# Altium PCB BroadPCB.PcbDoc
Units mm, origin at the board's own origin, x right, y up, seen from the top; angles counter-clockwise.
Board outline 99.69 x 75.56 mm, 2 copper layers (Top Layer, Bottom Layer); 78 components, 55 nets, 326 pads, 112 vias.
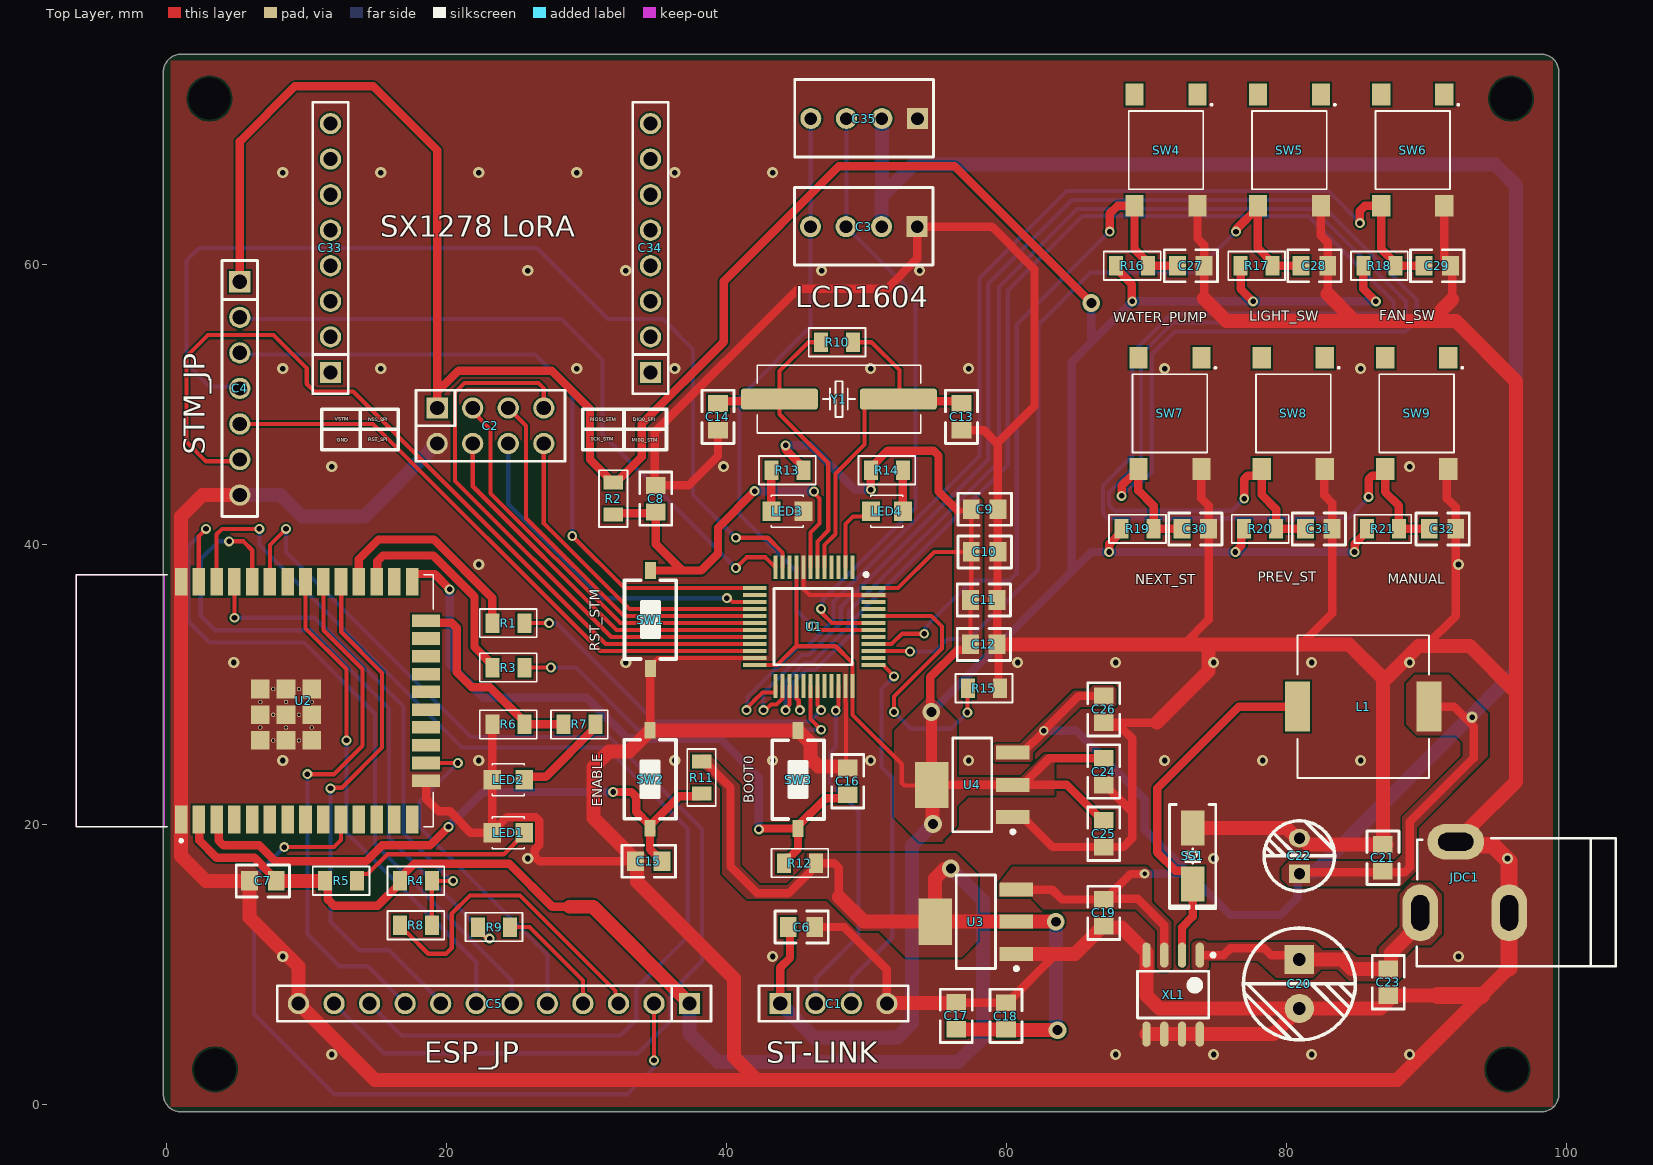
[diagram p0: Top Layer view]
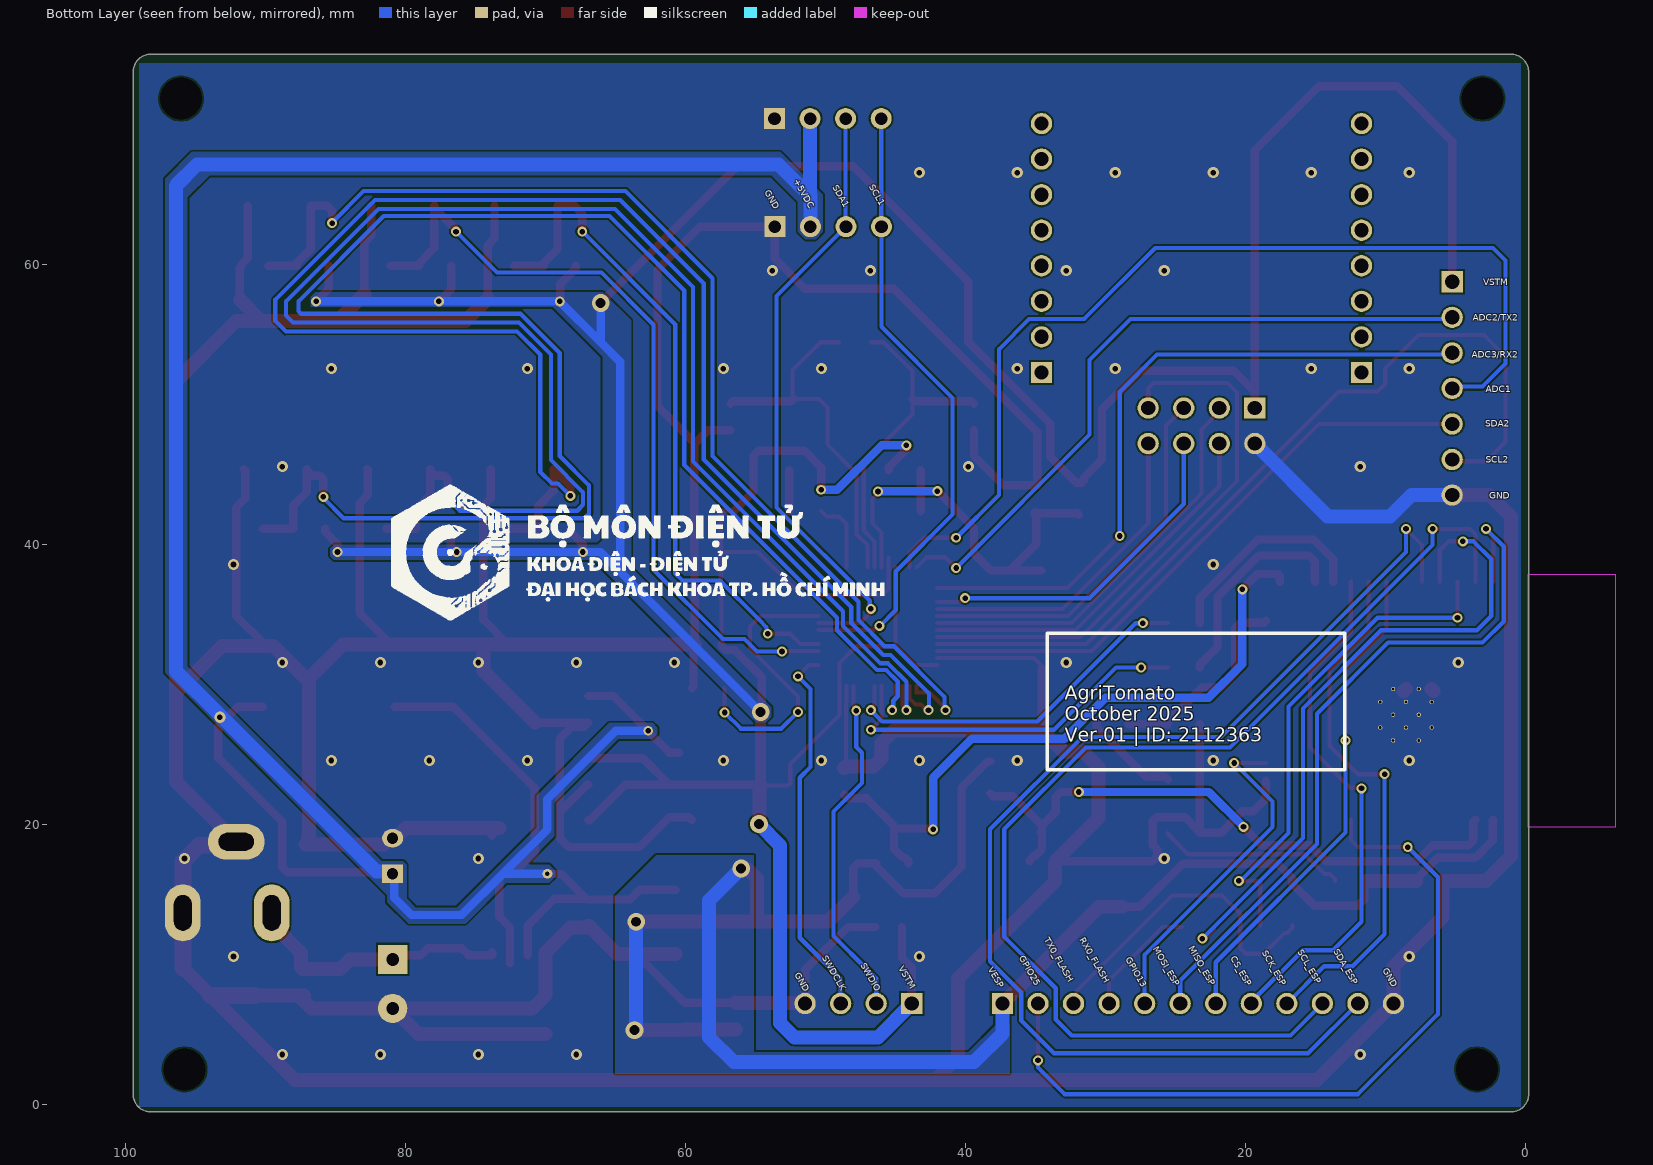
[diagram p1: Bottom Layer view, seen from below]
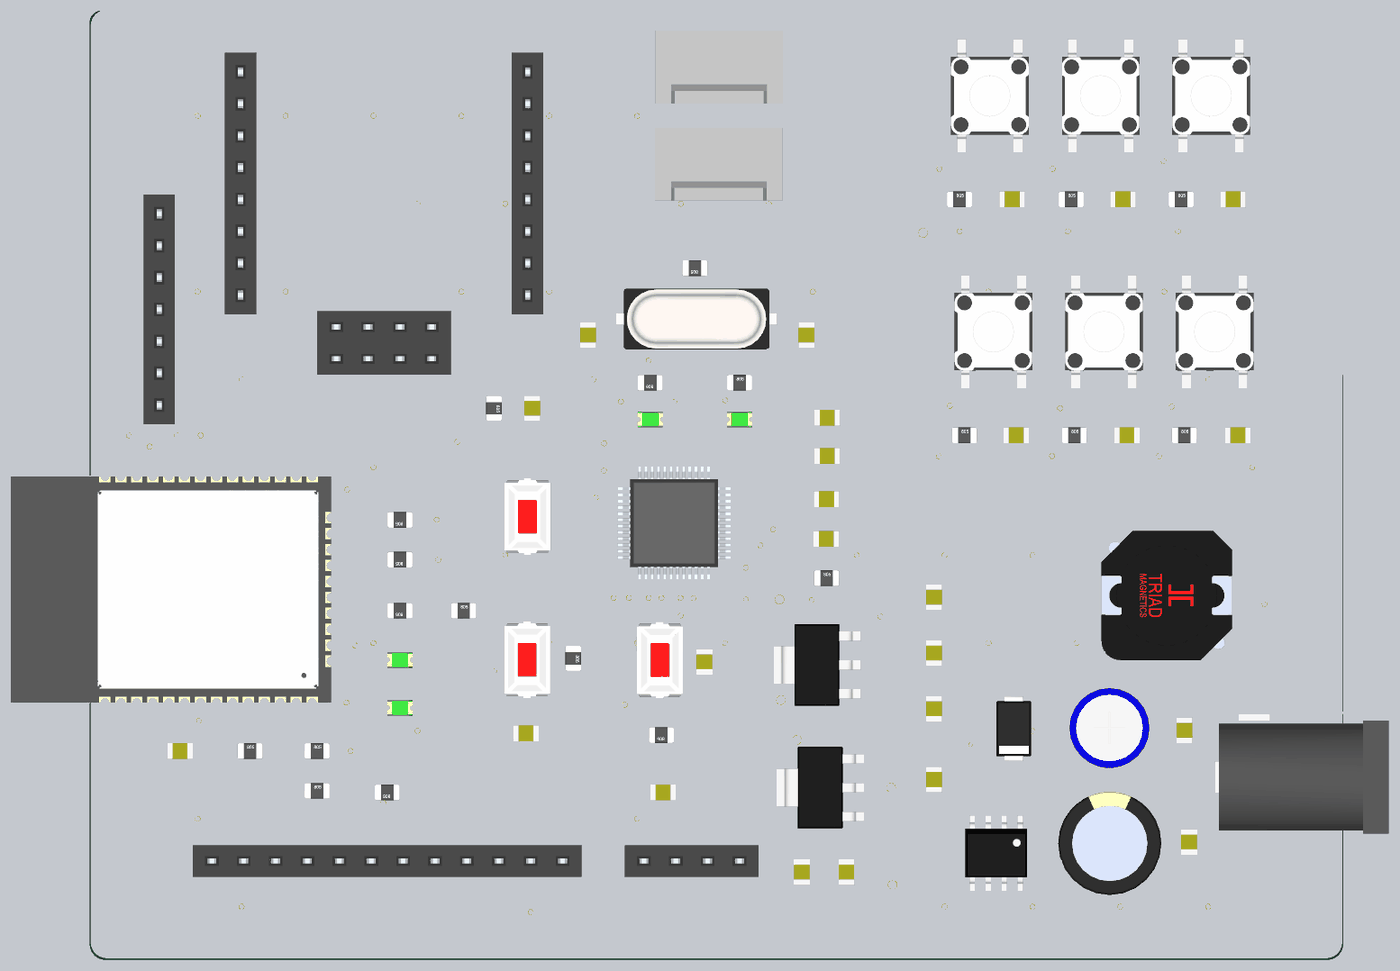
[diagram p2: 3D render of the assembled board from above, using the file's embedded part models]

## Layer stack, top to bottom
Top Solder: solder mask 0.0102, Solder Resist, Dk 3.5
Top Layer: signal copper 0.0356
Dielectric 1: dielectric 0.32, FR-4, Dk 4.8
Bottom Layer: signal copper 0.0356
Bottom Solder: solder mask 0.0102, Solder Resist, Dk 3.5

## Board outline
-0.254,0.762 -0.254,73.787 cw(c1.016,73.787) 1.016,75.057 98.171,75.057 cw(c98.171,73.787) 99.441,73.787 99.441,0.762 cw(c98.171,0.762) 98.171,-0.508 1.016,-0.508 cw(c1.016,0.762)

## Design rules (kind name [scope] priority, off if disabled: settings)
Clearance [All] p1: gap=0.127 ignorepadtopadclearanceinfootprint=TRUE except(0.2: Arc-Via Track-Via Via-Via; 0.28: Arc-THPad Track-THPad)
HoleSize [All] p1: absolutevalues=TRUE maxlimit=10 minlimit=0.025 maxpercent=80.000 minpercent=20.000
HoleToHoleClearance [All] p1: gap=0.45 allowstackedmicrovias=TRUE
MinimumSolderMaskSliver [All] p1: minsoldermaskwidth=0.1
PlaneConnect [All] p1: pad.planeconnectstyle=Relief pad.reliefexpansion=0.508 pad.reliefentries=4 pad.reliefconductorwidth=0.508 pad.reliefairgap=0.254 via.planeconnectstyle=Direct via.reliefexpansion=0.508 via.reliefentries=4 via.reliefconductorwidth=0.254 via.reliefairgap=0.254
PolygonConnect [All] p1: connectstyle=Direct reliefconductorwidth=0.508 reliefentries=4 polygonreliefangle="90 Angle" airgapwidth=0.254
RoutingVias [All] p1: holewidth=0.711 width=1.27 viastyle="Through Hole" minholewidth=0.3 minwidth=0.5 maxholewidth=1 maxwidth=6.3
SilkToSolderMaskClearance [IsPad] p1: minsilkscreentomaskgap=0.15 clearancetoexposedcopper=TRUE
SolderMaskExpansion [All] p1: expansion=0.05 istentingtop=FALSE
Width [All] p1: maxlimit=3 minlimit=0.254 preferedwidth=0.6 minimp=50.000000 maximp=50.000000 favimp=50.000000
25 further rules are at their usual default settings.

## Components (designator, comment, footprint, x,y, rotation, side; value= is the part's Value field where it differs from the comment)
C1 "SWD" JP4-C1T 43.815,7.239 r0 top
C2 "LORA_JP" JP4-C2T 23.114,48.514 r0 top locked
C3 "LCD_HEAD" HDR4 53.594,62.738 r180 top
C4 "STM_JP" JP7-C1T 5.207,58.801 r270 top
C5 "ESP_JP" JP12-C1T 37.338,7.239 r180 top
C6 "0.1uF" "tu 0805" 45.339,12.7 r180 top
C7 "10uF" "tu 0805" 6.858,16.002 r180 top
C8 "0.1uF" "tu 0805" 34.925,43.307 r270 top
C9 "0.1uF" "tu 0805" 58.42,42.545 r180 top
C10 "0.1uF" "tu 0805" 58.42,39.497 r180 top
C11 "0.1uF" "tu 0805" 58.363,36.065 r180 top
C12 "0.1uF" "tu 0805" 58.358,32.89 r180 top
C13 "20pF" "tu 0805" 56.769,49.149 r270 top
C14 "20pF" "tu 0805" 39.37,49.149 r270 top
C15 "0.1uF" "tu 0805" 34.417,17.399 r0 top
C16 "0.1uF" "tu 0805" 48.641,23.114 r270 top
C17 "100nF" "tu 0805" 56.388,6.35 r90 top
C18 "10uF" "tu 0805" 59.944,6.35 r270 top
C19 "10uF" "tu 0805" 66.929,13.716 r90 top
C20 "470uF" "tu hoa 8mm" 80.899,8.636 r270 top
C21 "0.1uF" "tu 0805" 86.868,17.653 r270 top
C22 "100uF" "tu hoa 5mm" 80.899,17.78 r90 top
C23 "1uF" "tu 0805" 87.249,8.763 r270 top
C24 "100nF" "tu 0805" 66.932,23.814 r270 top
C25 "10uF" "tu 0805" 66.926,19.366 r90 top
C26 "10uF" "tu 0805" 66.926,28.251 r90 top
C27 "0.1uF" "tu 0805" 73.152,59.944 r180 top
C28 "0.1uF" "tu 0805" 81.98,59.941 r180 top
C29 "0.1uF" "tu 0805" 90.748,59.941 r180 top
C30 "0.1uF" "tu 0805" 73.471,41.145 r180 top
C31 "0.1uF" "tu 0805" 82.296,41.148 r180 top
C32 "0.1uF" "tu 0805" 91.129,41.145 r180 top
C33 "JP9" JP8-C1T 11.684,52.324 r90 top locked
C34 "JP8" JP8-C1T 34.544,52.324 r90 top locked
C35 "LCD_HEAD" HDR4 53.619,70.46 r180 top
JDC1 "Jac DC" DC0 92.71,16.256 r180 top locked
L1 "68uH" IND_370_401_140X70_SMD 80.77,28.448 r90 top
LED1 "LED" LED-0805-Green 25.527,19.431 r180 top value="LED 3 - 5 ly 2 Colour"
LED2 "LED" LED-0805-Green 25.527,23.241 r180 top value="LED 3 - 5 ly 2 Colour"
LED3 "LED" LED-0805-Green 43.18,42.418 r0 top value="LED 3 - 5 ly 2 Colour"
LED4 "LED" LED-0805-Green 52.578,42.418 r180 top value="LED 3 - 5 ly 2 Colour"
R1 "1K" RES-SMD-0805 24.384,34.417 r180 top
R2 "10K" RES-SMD-0805 31.877,43.307 r270 top
R3 "1K" RES-SMD-0805 24.384,31.242 r180 top
R4 "10K" RES-SMD-0805 17.78,16.002 r0 top
R5 "1K" RES-SMD-0805 12.446,16.002 r0 top
R6 "10K" RES-SMD-0805 24.384,27.178 r180 top
R7 "1K" RES-SMD-0805 29.464,27.178 r0 top
R8 "1K" RES-SMD-0805 17.78,12.827 r0 top
R9 "1K" RES-SMD-0805 23.368,12.7 r180 top
R10 "1M" RES-SMD-0805 47.879,54.483 r180 top
R11 "10K" RES-SMD-0805 38.195,23.385 r270 top
R12 "10K" RES-SMD-0805 45.212,17.272 r180 top
R13 "510" RES-SMD-0805 44.323,45.339 r180 top
R14 "510" RES-SMD-0805 51.435,45.339 r0 top
R15 "10K" RES-SMD-0805 58.369,29.769 r0 top
R16 "10K" RES-SMD-0805 68.961,59.944 r0 top
R17 "10K" RES-SMD-0805 77.851,59.944 r0 top
R18 "10K" RES-SMD-0805 86.614,59.944 r0 top
R19 "10K" RES-SMD-0805 69.342,41.148 r0 top
R20 "10K" RES-SMD-0805 78.105,41.148 r0 top
R21 "10K" RES-SMD-0805 86.868,41.148 r0 top
SS1 "SS34" "DIODE SMA" 73.279,17.78 r270 top
SW1 "EN/RST" SW1-SMD 34.544,34.671 r90 top value="SW chip 2 pin"
SW2 "EN/RST" SW1-SMD 34.512,23.258 r270 top value="SW chip 2 pin"
SW3 "BOOT" SW1-SMD 45.085,23.241 r270 top value="SW chip 2 pin"
SW4 "STATE_1" SW2-SMD 71.374,68.199 r270 top value="Button chip 4 pin"
SW5 "STATE_2" SW2-SMD 80.188,68.199 r270 top value="Button chip 4 pin"
SW6 "STATE_3" SW2-SMD 89.002,68.199 r270 top value="Button chip 4 pin"
SW7 "STATE_4" SW2-SMD 71.653,49.403 r270 top value="Button chip 4 pin"
SW8 "STATE_5" SW2-SMD 80.467,49.403 r270 top value="Button chip 4 pin"
SW9 "STATE_6" SW2-SMD 89.281,49.403 r270 top value="Button chip 4 pin"
U1 "STM32F103C8T6" LQFP-48_19.6_393_58X11_SMD 46.228,34.163 r270 top
U2 "ESP32 WROOM 32" ESP32-WROOM-32D 6.269,28.87 r90 top locked
U3 "LM1117-3.3V" SOT223 57.785,13.081 r90 top
U4 "LM1117-3.3V" SOT223 57.531,22.86 r90 top
XL1 "XL1509_5V" SO8 71.882,7.874 r270 top
Y1 "8MHz" "Thach Anh 2 chan SMD" 48.006,50.419 r0 top value=4Mhz

## Footprints (in the part's own frame and the unit in brackets; to place one, negate y for a bottom-side part, rotate by r counter-clockwise, add the part's x,y. Pads: shape width x height; smd on the part's side, far side on the other; paste and mask are expansions set on the pad)
DC0 [mil] "Jac DC input"
  oval 100x160 hole 50 slot 100 at 90 deg: 1(125,100) 2(-125,100)
  oval 160x100 hole 50 slot 100 at 0 deg: 3(25,-100)
  silkscreen extent -425,-110 135,250, body extent -410,-105 134,269, height 434
"DIODE SMA" [mm] "SMA"
  rect 2.5x1.7 smd: 1(-2,0) 2(2,0)
  silkscreen extent -3.68,-1.65 3.75,1.65, body extent -2.6,-1.37 2.6,1.37, height 2.4
ESP32-WROOM-32D [mm]
  rect 2x0.9 smd: 1(-8.5,5.26) 2(-8.5,3.99) 3(-8.5,2.72) 4(-8.5,1.45) 5(-8.5,0.18) 6(-8.5,-1.09) 7(-8.5,-2.36) 8(-8.5,-3.63) 9(-8.5,-4.9) 10(-8.5,-6.17) 11(-8.5,-7.44) 12(-8.5,-8.71) 13(-8.5,-9.98) 14(-8.5,-11.25) 25(8.5,-11.25) 26(8.5,-9.98) 27(8.5,-8.71) 28(8.5,-7.44) 29(8.5,-6.17) 30(8.5,-4.9) 31(8.5,-3.63) 32(8.5,-2.36) 33(8.5,-1.09) 34(8.5,0.18) 35(8.5,1.45) 36(8.5,2.72) 37(8.5,3.99) 38(8.5,5.26)
  rect 0.9x2 smd: 15(-5.715,-12.25) 16(-4.445,-12.25) 17(-3.175,-12.25) 18(-1.905,-12.25) 19(-0.635,-12.25) 20(0.635,-12.25) 21(1.905,-12.25) 22(3.175,-12.25) 23(4.445,-12.25) 24(5.715,-12.25)
  rect 1.33x1.33 smd: 39(-2.835,-2.24) 39(-2.835,-0.405) 39(-2.835,-4.075) 39(-1,-0.405) 39(-1,-4.075) 39(-1,-2.24) 39(0.835,-0.405) 39(0.835,-4.075) 39(0.835,-2.24)
  round 0.3 hole 0.2 mask+0.08: 39(-2.835,-1.322) 39(-2.835,-3.157) 39(-1.917,-2.24) 39(-1.917,-0.405) 39(-1.917,-4.075) 39(-1,-1.322) 39(-1,-3.157) 39(-0.082,-0.405) 39(-0.082,-2.24) 39(-0.082,-4.075) 39(0.835,-1.322) 39(0.835,-3.157)
  Keep-Out Layer region: 9,6.45 -9,6.45 -9,12.75 9,12.75
  Keep-Out Layer region: 9,6.45 -9,6.45 -9,12.75 9,12.75
  silkscreen extent -10.1,-12.75 9,12.75, body extent -9,-12.62 9,12.88, height 3.2
HDR4 [mm] "Connector; Header; 4 Position"
  rect 1.5x1.5 hole 0.9: 1(0,0)
  round 1.5 hole 0.9: 2(2.54,0) 3(5.08,0) 4(7.62,0)
  silkscreen extent -1.14,-2.79 8.76,2.74, body extent -1.27,-2.92 8.89,2.88, height 11.72
IND_370_401_140X70_SMD [mm] "SMD INDUCTOR"
  rect 3.56x1.78 smd: 1(0,0) 2(0,-9.4)
  silkscreen extent -5.1,-9.4 5.1,0, body extent -5.2,-9.9 5.1,0.5, height 4.01
JP4-C1T [mm] "4 row, straight, gold plating"
  rect 1.52x1.52 hole 1.02: 1(0,0)
  round 1.52 hole 1.02: 2(2.54,0) 3(5.08,0) 4(7.62,0)
  silkscreen extent -1.52,-1.27 9.14,1.27, body extent -1.52,-1.25 9.14,1.25, height 8.51
JP4-C2T [mm] "8 pins, dual row, straight, gold plating"
  rect 1.52x1.52 hole 1.02: 1(-3.81,1.27)
  round 1.52 hole 1.02: 2(-1.27,1.27) 3(1.27,1.27) 4(3.81,1.27) 5(3.81,-1.27) 6(1.27,-1.27) 7(-1.27,-1.27) 8(-3.81,-1.27)
  silkscreen extent -5.33,-2.54 5.33,2.54, body extent -5.33,-2.54 5.33,2.54, height 8.51
JP7-C1T [mm] "7 row, straight, gold plating"
  rect 1.52x1.52 hole 1.02: 1(0,0)
  round 1.52 hole 1.02: 2(2.54,0) 3(5.08,0) 4(7.62,0) 5(10.16,0) 6(12.7,0) 7(15.24,0)
  silkscreen extent -1.52,-1.27 16.76,1.27, body extent -1.52,-1.25 16.76,1.25, height 8.51
JP8-C1T [mm] "8 row, straight, gold plating"
  rect 1.52x1.52 hole 1.02: 1(0,0)
  round 1.52 hole 1.02: 2(2.54,0) 3(5.08,0) 4(7.62,0) 5(10.16,0) 6(12.7,0) 7(15.24,0) 8(17.78,0)
  silkscreen extent -1.52,-1.27 19.3,1.27, body extent -1.52,-1.25 19.3,1.25, height 8.51
JP12-C1T [mm] "12 row, straight, gold plating"
  rect 1.52x1.52 hole 1.02: 1(0,0)
  round 1.52 hole 1.02: 2(2.54,0) 3(5.08,0) 4(7.62,0) 5(10.16,0) 6(12.7,0) 7(15.24,0) 8(17.78,0) 9(20.32,0) 10(22.86,0) 11(25.4,0) 12(27.94,0)
  silkscreen extent -1.52,-1.27 29.46,1.27, body extent -1.52,-1.25 29.46,1.25, height 8.51
LED-0805-Green [mil]
  rect 50x55 smd: 1(0,0) 2(90,0)
  silkscreen extent 0,-45 90,45, body extent 5,-25 85,25, height 43
LQFP-48_19.6_393_58X11_SMD [mm] "48LQFP"
  rect 1.7x0.3 smd mask+0.05: 1(-4.238,2.75) 2(-4.238,2.25) 3(-4.238,1.75) 4(-4.238,1.25) 5(-4.238,0.75) 6(-4.238,0.25) 7(-4.238,-0.25) 8(-4.238,-0.75) 9(-4.238,-1.25) 10(-4.238,-1.75) 11(-4.238,-2.25) 12(-4.238,-2.75) 25(4.238,-2.75) 26(4.238,-2.25) 27(4.238,-1.75) 28(4.238,-1.25) 31(4.238,0.25) 32(4.238,0.75) 33(4.238,1.25) 34(4.238,1.75) 35(4.238,2.25) 36(4.238,2.75)
  rect 0.3x1.7 smd mask+0.05: 13(-2.75,-4.238) 14(-2.25,-4.238) 15(-1.75,-4.238) 16(-1.25,-4.238) 17(-0.75,-4.238) 18(-0.25,-4.238) 19(0.25,-4.238) 20(0.75,-4.238) 21(1.25,-4.238) 22(1.75,-4.238) 23(2.25,-4.238) 24(2.75,-4.238) 37(2.75,4.238) 38(2.25,4.238) 39(1.75,4.238) 40(1.25,4.238) 41(0.75,4.238) 42(0.25,4.238) 43(-0.25,4.238) 44(-0.75,4.238) 45(-1.25,4.238) 46(-1.75,4.238) 47(-2.25,4.238) 48(-2.75,4.238)
  rect 1.7x0.3 smd paste+0 mask+0.05: 29(4.238,-0.75)
  rect 1.7x0.3 smd paste+0.05 mask+0.05: 30(4.238,-0.25)
  silkscreen extent -3.84,-2.85 2.73,3.85, body extent -4.5,-4.5 4.5,4.5, height 1.7
RES-SMD-0805 [mil]
  rect 39.37x55 smd mask+2.99: 1(-45,0) 2(45,0)
  silkscreen extent -80,-40 80,40, body extent -39,-25 39,25, height 31
SO8 [mm] "SOIC, 8-Leads, Body 4.9x3.9mm, Pitch 1.27mm, IPC High Density"
  oval 1.8x0.6 smd: 1(-2.825,1.905) 2(-2.825,0.635) 3(-2.825,-0.635) 4(-2.825,-1.905) 5(2.825,-1.905) 6(2.825,-0.635) 7(2.825,0.635) 8(2.825,1.905)
  silkscreen extent -2.95,-2.55 1.68,2.98, body extent -2.99,-2.45 3,2.45, height 1.6
SOT223 [mm]
  rect 1x2.4 smd: 1(-2.3,-2.9) 2(0,-2.9) 3(2.3,-2.9)
  rect 3.3x2.4 smd: 4(0,2.9)
  silkscreen extent -3.47,-3.03 3.35,1.4, body extent -3.25,-3.56 3.25,3.4, height 1.68
SW1-SMD [mm]
  rect 1.2x0.8 smd: 1(-3.5,0) 2(3.5,0)
  silkscreen extent -2.82,-1.85 2.82,1.85, body extent -3.05,-1.85 3.05,1.85, height 2.5
SW2-SMD [mm] "6*6mm vertical type, SMD, height 5.0mm, black actuator, 160gf, T&R"
  rect 1.55x1.3 smd: 1(-3.975,2.25) 2(-3.975,-2.25) 3(3.975,-2.25) 4(3.975,2.25)
  silkscreen extent -3.29,-2.67 2.79,3.29, body extent -4.5,-3.1 4.5,3.1, height 4.99
"Thach Anh 2 chan SMD" [mm] "SMD Crystal HC49/US-SM package"
  round 0.508 on Mech15: 0(0,0)
  rrect25% 5.5x1.5 smd: 1(-4.25,0) 2(4.25,0)
  silkscreen extent -5.84,-2.41 5.84,2.41, body extent -6.4,-2.41 6.4,2.42, height 4.29
"tu 0805" [mm] "Compoment SMD 80x50mil"
  rect 1.2x1.4 smd: 1(-0.946,-0.003) 2(0.954,-0.003)
  silkscreen extent -1.91,-1.14 1.91,1.14, body extent -1.01,-0.64 1.01,0.63, height 0.61
"tu hoa 5mm" [mm]
  rect 1.3x1.5 hole 0.8: 1(-1.27,0)
  oval 1.3x1.5 hole 0.8: 2(1.27,0)
  silkscreen extent -2.51,-2.51 2.51,2.51, body extent -3.12,-3.18 3.23,3.18, height 14.55
"tu hoa 8mm" [mm]
  rect 2.1x2.1 hole 0.9: 1(-1.75,0)
  round 2.1 hole 0.9: 2(1.75,0)
  silkscreen extent -4,-4 4,4, body extent -4.1,-4.07 4.1,4.13, height 13.81

## Part data
C1: library part JP4, "WR-PHD 2.54 mm Angled Socket Header", Manufacturer="W¨¹rth Elektronik eiSos GmbH", partNo=613004143121, ComponentLink1 Description=Manufacturer, ComponentLink1URL=http://www.we-online.com, ComponentLink2 Description=Datasheet, ComponentLink2URL=http://katalog.we-online.de/em/datasheet/6130xx143121.pdf, Created by="Karrer Zheng", Created Date="29 March 2013", NoPins=04
C2: library part JP4x2, "WR-PHD 2.54 mm Dual Socket Header", Manufacturer="W¨¹rth Elektronik eiSos GmbH", partNo=61300821821, ComponentLink1 Description=Manufacturer, ComponentLink1URL=http://www.we-online.com, ComponentLink2 Description=Datasheet, ComponentLink2URL=http://katalog.we-online.de/em/datasheet/6130xx21821.pdf, Created by="Karrer Zheng", Created Date="29 March 2013", NoPins=08
C3 C35: library part Header4, "Header IDC, 4 x 1 Pin Vertical 2.54mm Pitch (Non-Boxed, Male)", Manufacturer="W¨¹rth Elektronik eiSos GmbH", partNo=613002143121, ComponentLink1 Description=Manufacturer, ComponentLink1URL=http://www.we-online.com, ComponentLink2 Description=Datasheet, ComponentLink2URL=http://katalog.we-online.de/em/datasheet/6130xx143121.pdf, Created by="Karrer Zheng", Created Date="29 March 2013", NoPins=02
C4: library part JP7, "WR-PHD 2.54 mm Angled Socket Header", Manufacturer="W¨¹rth Elektronik eiSos GmbH", partNo=613007143121, ComponentLink1 Description=Manufacturer, ComponentLink1URL=http://www.we-online.com, ComponentLink2 Description=Datasheet, ComponentLink2URL=http://katalog.we-online.de/em/datasheet/6130xx143121.pdf, Created by="Karrer Zheng", Created Date="29 March 2013", NoPins=07
C5: library part JP12, "WR-PHD 2.54 mm Angled Socket Header", Manufacturer="W¨¹rth Elektronik eiSos GmbH", partNo=613012143121, ComponentLink1 Description=Manufacturer, ComponentLink1URL=http://www.we-online.com, ComponentLink2 Description=Datasheet, ComponentLink2URL=http://katalog.we-online.de/em/datasheet/6130xx143121.pdf, Created by="Karrer Zheng", Created Date="29 March 2013", NoPins=12
C6 C8 C9 C10 C11 C12 C15 C16 C17 C21 C24 C27 C28 C29 C30 C31 C32: library part "Tu 0805 104 50V 10%", "Dán", Chung_Loai=Dán, Don_Vi=Con, Ma_Hang=MH004551, So_Chan=2, Ten_Linh_Kien="Tụ 0805 104-100nF 10% 50V"
C7 C18 C19 C25 C26: library part "Tu 0805 106 16V 10%", "Dán", Chung_Loai=Dán, Don_Vi=Con, Ma_Hang=MH004553, So_Chan=2, Ten_Linh_Kien="Tụ 0805 106-10uF 10% 16V"
C13 C14: library part "Tu 0805 20pF 50V 10%", "Dán", Chung_Loai=Dán, Don_Vi=Con, Ma_Hang=MH004558, So_Chan=2, Ten_Linh_Kien="Tụ 0805 20P 10% 50V"
C20: library part "Tu Hoa 470uF 16V 8x11", "Cắm", Chung_Loai=Cắm, Don_Vi=Con, Ma_Hang=MH006550, So_Chan=2, Ten_Linh_Kien="Tụ Hóa 470uF 16V 8x11MM"
C22: library part "Tu Hoa 100uF 16V 5x11", "Cắm", Chung_Loai=Cắm, Don_Vi=Con, Ma_Hang=MH008417, So_Chan=2, Ten_Linh_Kien="Tụ Hóa 100uF 16V 5x11MM"
C23: library part "Tu 0805 105 50V 10%", "Dán", Chung_Loai=Dán, Don_Vi=Con, Ma_Hang=MH004552, So_Chan=2, Ten_Linh_Kien="Tụ 0805 105-1uF 10% 50V"
C33: library part JP8, "WR-PHD 2.54 mm Angled Socket Header", Manufacturer="W¨¹rth Elektronik eiSos GmbH", partNo=613008143121, ComponentLink1 Description=Manufacturer, ComponentLink1URL=http://www.we-online.com, ComponentLink2 Description=Datasheet, ComponentLink2URL=http://katalog.we-online.de/em/datasheet/6130xx143121.pdf, Created by="Karrer Zheng", Created Date="29 March 2013", NoPins=08
C34: "WR-PHD 2.54 mm Angled Socket Header", Manufacturer="W¨¹rth Elektronik eiSos GmbH", partNo=613008143121, ComponentLink1 Description=Manufacturer, ComponentLink1URL=http://www.we-online.com, ComponentLink2 Description=Datasheet, ComponentLink2URL=http://katalog.we-online.de/em/datasheet/6130xx143121.pdf, Created by="Karrer Zheng", Created Date="29 March 2013", NoPins=08
JDC1: library part DCIN, "Jac DC input"
L1: library part IND_15uH-3.8A-30%-SMD, "Fixed Inductors MSS1038 SMT Shielded 15 uH 20 % 3.8 A", Alternate Part Number-1=NA, Case/Package=SMD, Manufacturer=Bourns, Manufacturer Part Number=MSS1038-153MLC, Supplier Part Number-1=MSS1038-153MLC, Supplier-1="COILCRAFT SAMPLE"
LED1 LED2 LED3 LED4: library part "LED SMD"
R1 R2 R3 R4 R5 R6 R7 R8 R9 R10 R11 R12 R13 R14 R15 R16 R17 R18 R19 R20 R21: library part Res-SMD, "Resistor", Manufacturer="Generic Components", Class=Passive, Published=08/06/2000, Publisher="Altium Hobart Technology Centre"
SS1: library part "Diode SS34 ( 1N5822 )", "Dán", Chung_Loai=Dán, Don_Vi=Con, Ma_Hang=MH002104, Ten_Linh_Kien="Diode SS34 3A 40V SMA ( 1N5822 SS34A)"
SW1 SW2 SW3: library part SW2, "Switch button 2 pin"
SW4 SW5 SW6 SW7 SW8 SW9: library part SW4, "Switch button 4 pin"
U1: library part IC_STM32F103C8T6, "ARM® Cortex®-M3 STM32F1 Microcontroller IC 32-Bit 72MHz 64KB (64K x 8) FLASH 48-LQFP (7x7)", Alternate Part Number-1=NA, Case/Package=LQFP48, Manufacturer=STMicroelectronics, ComponentLink1Description="New link", Manufacturer Part Number=STM32F103C8T6, Supplier Part Number-1=STM32F103C8T6, Supplier-1=LCSC
U3 U4: library part LM1117, "800mA Low-Dropout Linear Regulator", Creator="Nguyen Ba Bien", Website=http://group3i.net
XL1: library part XL1509
Y1: library part "Thach Anh 2 chan SMD", "Crystal For all Crystal 2pin."

## Free pads (board coordinates)
  round 0 hole 3 unplated: 7(3.048,71.882) 7(3.429,2.54) 7(95.758,2.54) 7(96.012,71.882)

## Via types
v1: diameter 0.8, hole 0.4, Top Layer to Bottom Layer, 51 vias
v2: diameter 0.711, hole 0.4, Top Layer to Bottom Layer, tented both sides, 48 vias
v3: diameter 1.27, hole 0.711, Top Layer to Bottom Layer, tented both sides, 6 vias
v4: diameter 0.7, hole 0.4, Top Layer to Bottom Layer, tented both sides, 5 vias
v5: diameter 0.7/0.7 (per signal layer), hole 0.4, Top Layer to Bottom Layer, tented both sides, 1 vias
v6: diameter 0.711, hole 0.3, Top Layer to Bottom Layer, tented both sides, 1 vias

## Nets (pads, with @x,y where several pads share a name; then routed paths per layer and width w, separated by ;. In a path a pad name is that pad's centre, name@x,y a point inside that pad or via, vN(x,y) a via of type N, cw(c..) or ccw(c..) an arc to the next point about the centre after c; other vN are vias at no path point)
+5: C3.2 C19.2 C21.2 C22.1 C26.2 C35.2 L1.2 U3.3 U4.3 XL1.3 | length 190.3
  Top Layer w0.6: U4.3 61.131,25.16 62.617,26.646 62.617,26.702 65.121,29.205 C26.2 ; U3.3 60.699,15.367 63.246,15.367 63.943,14.67 C19.2 67.032,14.67 C19.2@67.094,14.732 ; v6(69.85,16.51) 69.829,16.489 68.851,16.489 C19.2@67.094,14.732 ; XL1.3 71.247,12.827 69.342,14.732 C19.2@67.094,14.732 ; C22.1 80.993,16.604 88.422,16.604 88.773,16.956 88.773,20.193 93.345,24.765 93.345,27.051 91.948,28.448 L1.2
  Bottom Layer w0.6: v4(62.636,26.721) 64.973,26.721 69.85,21.844 69.85,19.685 73.025,16.51 ; v6(69.85,16.51) 73.025,16.51 ; C22.1 80.772,16.383 80.772,14.783 79.553,13.564 75.971,13.564 73.025,16.51
  Bottom Layer w1: C3.2 51.054,64.988 ; 51.079,64.988 C35.2 ; 51.145,64.988 53.34,67.183 94.869,67.183 96.393,65.659 96.393,30.988 93.17,27.765 82.065,16.66 81.049,16.66 C22.1
  other v1: 93.243,27.692
ADC1: C4.4 U1.11 | length 71
  Top Layer w0.3: v2(40.64,40.513) 42.926,40.513 43.978,39.461 U1.11
  Bottom Layer w0.3: C4.4 5.08,51.308 3.048,51.308 1.397,52.959 1.397,60.325 2.286,61.214 26.416,61.214 31.496,56.134 35.433,56.134 37.592,53.975 37.592,43.561 v2(40.64,40.513)
ADC2/TX2: C4.2 U1.12 | length 49.4
  Top Layer w0.3: v2(40.64,38.354) 41.402,39.116 42.763,39.116 U1.12
  Bottom Layer w0.3: C4.2 5.334,56.134 28.194,56.134 31.115,53.213 31.115,47.879 v2(40.64,38.354)
ADC3/RX2: C4.3 U1.13 | length 49.8
  Top Layer w0.3: v2(28.956,40.64) 32.683,36.913 U1.13
  Bottom Layer w0.3: C4.3 5.334,53.594 26.289,53.594 28.956,50.927 v2(28.956,40.64)
CS_ESP: C5.8 U2.29 | length 37.8
  Top Layer w0.3: v2(11.684,22.606) 11.728,22.65 12.49,22.65 15.367,25.527 15.367,30.861 12.45,33.778 12.45,37.359 U2.29
  Bottom Layer w0.3: v2(11.684,22.606) 11.684,13.081 13.716,11.049 15.875,11.049 19.558,7.366 C5.8
DIO0_SPI: C2.4 U1.20 | length 40.5
  Top Layer w0.3: C2.4 26.924,51.181 26.543,51.562 21.258,51.562 20.574,50.878 20.574,44.577 31.738,33.413 U1.20
EN: C15.2 R11.2 SW2.2 U2.3 | length 44.4
  Top Layer w0.6: U2.3 3.699,20.22 3.699,18.893 4.05,18.542 6.604,18.542 7.747,17.399 14.224,17.399 15.367,18.542 18.796,18.542 v2(20.117,19.863) ; v2(31.877,22.352) 33.177,22.352 33.528,22.001 33.528,20.942 SW2.2@34.512,19.958 ; SW2.2@34.612,19.519 SW2.2@34.512,19.619 ; C15.2 35.371,17.496 35.071,17.796 34.974,17.796 34.512,18.258 SW2.2@34.512,19.619 ; R11.2 37.996,22.043 36.597,22.043 SW2.2@34.512,19.958 ; SW2.2@34.512,19.619 SW2.2 SW2.2@34.512,19.958
  Bottom Layer w0.6: v2(20.117,19.863) 20.117,19.872 22.597,22.352 v2(31.877,22.352)
ESP_RXD: R3.2 U2.27 | length 15.4
  Top Layer w0.6: U2.27 15.03,37.421 15.03,38.842 15.43,39.243 19.025,39.243 21.971,36.297 21.971,32.711 23.241,31.44 R3.2
ESP_TXD: R1.2 U2.28 | length 15.3
  Top Layer w0.6: U2.28 13.709,38.982 15.113,40.386 19.075,40.386 23.241,36.22 R1.2
GND: C1.4 C2.8 C3.1 C4.7 C5.12 C6.1 C7.2 C8.1 C9.1 C10.1 C11.1 C12.1 C13.2 C14.2 C15.1 C16.1 C17.2 C18.1 C19.1 C20.2 C21.1 C22.2 C23.2 C24.2 C25.1 C26.1 C27.1 C28.1 C29.1 C30.1 C31.1 C32.1 C35.1 JDC1.2 JDC1.3 LED1.2 LED2.2 LED3.2 R6.2 R15.2 SS1.1 SW1.1 SW2.1 SW3.1 SW4.4 SW5.4 SW6.4 SW7.4 SW8.4 SW9.4 U1.8 U1.23 U1.35 U1.47 U2.1 U2.15 U2.38 U2.39 U3.1 U4.1 XL1.4 XL1.5 XL1.6 XL1.7 XL1.8 | length 649.4
  Top Layer w0.3: SW1.1@34.528,31.155 34.528,31.355 35.086,31.913 U1.23 ; U1.8@45.478,39.101 U1.8 45.478,36.843 45.908,36.413 U1.47 ; U1.35 48.478,28.736 48.506,28.708 48.506,24.191 C16.1@48.538,24.16
  Top Layer w0.6: U2.15 18.519,21.867 19.402,20.984 20.206,20.984 21.089,20.101 21.089,20.048 21.706,19.431 LED1.2 LED2.2 R6.2 ; LED1.2@23.241,19.494 24.303,20.556 26.339,20.556 26.589,20.306 26.589,18.556 26.277,18.244 26.277,17.747 26.629,17.396 C15.1 C15.1@33.571,17.296 ; SW2.1 34.528,26.774 SW1.1@34.528,31.155 ; C14.2 39.367,46.352 37.268,44.253 C8.1 34.847,44.327 34.847,48.055 45.085,58.293 51.435,58.293 53.594,60.452 C3.1 58.928,62.738 61.976,59.69 61.976,49.936 59.366,47.326 59.366,47.187 ; C6.1@46.412,12.703 48.384,12.703 51.435,9.652 C1.4 ; C17.2 56.396,7.3 59.936,7.3 C18.1 60.041,7.296 63.373,10.628 ; C13.2 58.358,48.195 59.366,47.187 ; R15.2 59.408,29.873 59.408,32.789 C12.1 59.306,32.895 59.306,36.065 C11.1 59.337,36.096 59.337,39.472 C10.1 C9.1 59.366,47.187 ; U4.1@59.531,20.36 59.731,20.56 U4.1 61.131,20.56 63.271,18.42 C25.1 68.331,18.42 68.961,19.05 68.961,20.928 ; C24.2 67.029,22.86 68.961,20.928 ; 70.739,27.305 C26.1 67.229,27.005 68.118,27.005 68.961,26.162 68.961,20.928 ; 72.644,32.893 74.417,34.666 C30.1 74.417,42.804 73.903,43.318 SW7.4 ; SS1.1 SS1.1@73.829,19.23 ; SW4.4 73.624,61.885 74.098,61.411 C27.1 74.098,57.601 ; C22.2@80.775,18.866 C22.2@80.874,18.768 ; 81.026,32.893 83.242,35.109 C31.1 83.242,42.996 82.677,43.561 82.677,45.388 SW8.4 ; SW5.4 82.438,62.088 82.926,61.6 C28.1 82.926,57.917 ; 89.916,32.766 92.075,34.925 C32.1 92.075,42.672 91.44,43.307 91.44,45.337 SW9.4 ; SW6.4 91.252,60.486 91.694,60.044 C29.1 91.821,59.817 91.821,57.531
  Top Layer w1: C4.7 2.54,43.561 1.016,42.037 1.016,37.377 U2.38 U2.1 1.009,17.787 2.791,16.005 C7.2 5.904,13.39 9.398,9.895 C5.12 14.859,1.778 42.164,1.778 ; U2.39@6.534,29.565 U2.39@6.674,29.705 ; U2.39@8.509,29.705 U2.39@8.674,29.54 ; C15.1 33.471,17.496 30.48,20.487 30.48,24.13 31.594,25.244 32.998,25.244 SW2.1 34.521,26.75 45.076,26.75 45.974,25.852 45.974,24.745 46.56,24.16 48.538,24.16 C16.1 ; C15.1@33.571,17.296 33.571,15.959 40.513,9.017 40.513,3.429 42.164,1.778 ; C1.4 51.468,7.272 56.359,7.272 C17.2 ; C12.1 72.644,32.893 74.422,32.893 ; U3.1 64.883,10.781 66.732,12.63 66.732,12.67 66.832,12.77 C19.1 67.032,12.67 68.206,12.67 69.977,10.899 XL1.4 69.977,7.825 70.916,6.886 C20.2 ; XL1.5 XL1.6 XL1.7 XL1.8 79.062,5.049 C20.2 ; 70.739,27.305 74.422,30.988 74.422,32.893 ; SS1.1 79.988,19.78 80.718,19.05 C22.2 81.08,19.05 81.532,18.599 C21.1@87.119,18.599 ; 74.098,57.601 75.692,56.007 84.836,56.007 ; 82.926,57.917 84.836,56.007 ; C21.1@87.019,18.599 86.919,18.699 86.919,19.234 86.868,19.284 86.868,30.477 84.452,32.893 81.026,32.893 74.422,32.893 ; 87.119,30.477 89.408,32.766 89.916,32.766 93.091,32.766 96.393,29.464 ; C23.2 90.743,7.809 ; C23.2@87.434,7.62 86.7,6.886 C20.2 ; 91.821,57.531 90.297,56.007 ; JDC1.3 92.42,18.796 93.132,19.507 93.132,19.853 96.393,23.114 96.393,29.464 ; 95.885,9.779 93.915,7.809 87.884,1.778 42.164,1.778 ; 84.836,56.007 90.297,56.007 ; 90.297,56.007 92.075,56.007 96.393,51.689 96.393,29.464
  Top Layer w1.2: 90.743,7.809 93.915,7.809 ; JDC1.3 92.331,18.54 94.744,18.54 95.885,17.399 JDC1.2 95.885,9.779
  Bottom Layer w1: C4.7 8.128,43.561 9.652,42.037 14.097,42.037 C2.8
  other v1: 11.771,3.599 67.771,3.599 74.771,3.599 81.771,3.599 88.771,3.599 8.271,10.599 43.271,10.599 92.271,10.599 25.771,17.599 74.771,17.599 95.771,17.599 8.271,24.599 22.271,24.599 36.271,24.599 43.271,24.599 50.271,24.599 57.271,24.599 71.271,24.599 78.271,24.599 85.271,24.599 4.771,31.599 32.771,31.599 60.771,31.599 67.771,31.599 74.771,31.599 81.771,31.599 88.771,31.599 22.271,38.599 92.271,38.599 11.771,45.599 39.771,45.599 88.771,45.599 8.271,52.599 15.271,52.599 29.271,52.599 36.271,52.599 50.271,52.599 57.271,52.599 71.271,52.599 85.271,52.599 25.771,59.599 32.771,59.599 46.771,59.599 53.771,59.599 8.271,66.599 15.271,66.599 22.271,66.599 29.271,66.599 36.271,66.599 43.271,66.599
GPIO0: C16.2 R12.2 SW3.2 U2.25 | length 48.6
  Top Layer w0.6: U2.25 17.519,37.772 17.669,37.922 19.132,37.922 20.194,36.861 v2(20.194,36.831) ; v2(42.291,19.685) 42.321,19.685 42.377,19.741 SW3.2 ; R12.2 44.069,17.47 44.269,17.671 44.468,17.671 45.085,18.288 SW3.2 ; C16.2 48.372,21.894 47.038,21.894 45.085,19.941 SW3.2
  Bottom Layer w0.6: v2(20.194,36.831) 20.194,31.495 22.606,29.083 29.972,29.083 32.893,26.162 39.497,26.162 42.291,23.368 v2(42.291,19.685)
GPIO2: R6.1 R7.1 U2.24 | length 14.8
  Top Layer w0.6: U2.24 18.669,34.435 20.35,34.435 20.701,34.084 20.701,30.915 21.771,29.845 23.059,29.845 25.527,27.376 R6.1 R7.1
GPIO13: C5.5 U2.16 | length 24.4
  Top Layer w0.3: U2.16 v2(20.787,24.425) v2@20.828,24.384
  Bottom Layer w0.3: v2(20.787,24.425) 18.034,21.672 18.034,19.863 27.178,10.719 C5.5
GPIO25: C5.2 U2.10 | length 54.9
  Top Layer w0.3: v2(8.382,18.415) 11.938,18.415 12.439,18.916 U2.10 ; v2(34.798,3.175) C5.2
  Bottom Layer w0.3: v2(8.382,18.415) 6.223,16.256 6.223,6.477 11.938,0.762 32.893,0.762 34.798,2.667 v2(34.798,3.175)
MISO_ESP: C5.7 U2.31 | length 35.2
  Top Layer w0.3: U2.31 9.899,34.043 12.827,31.115 v2(12.827,26.035)
  Bottom Layer w0.3: v2(12.827,26.035) 12.827,19.456 22.098,10.185 C5.7
MISO_STM: C2.5 U1.16 | length 23.3
  Top Layer w0.3: C2.5 26.924,41.529 33.04,35.413 U1.16
MOSI_ESP: C5.6 U2.37 | length 51.9
  Top Layer w0.3: U2.37 2.279,40.633 v2(2.794,41.148)
  Bottom Layer w0.3: v2(2.794,41.148) 1.524,39.878 1.524,34.544 3.048,33.02 9.779,33.02 14.859,27.94 14.859,18.644 24.638,8.865 C5.6
MOSI_STM: C2.3 U1.17 | length 27.6
  Top Layer w0.3: C2.3 25.654,48.514 25.654,41.91 32.651,34.913 U1.17
NetL1_1: L1.1 SS1.2 XL1.2 | length 26.7
  Top Layer w0.6: XL1.2@72.517,10.099 XL1.2 72.517,12.684 73.279,13.446 73.279,16.18 72.729,16.73 72.043,16.73 70.739,18.034 70.739,22.606 76.581,28.448 L1.1
NetLED1_1: LED1.1 R5.2 | length 13.5
  Top Layer w0.3: R5.2 13.589,16.142 13.939,16.492 14.333,16.492 15.748,17.907 24.066,17.907 25.527,19.367 LED1.1
NetLED2_1: LED2.1 R7.2 | length 6.8
  Top Layer w0.6: LED2.1 25.721,23.435 27.062,23.435 30.607,26.98 R7.2
NetLED3_1: LED3.1 R13.2 | length 2.9
  Top Layer w0.6: LED3.1 R13.2
NetLED4_1: LED4.1 R14.2 | length 2.9
  Top Layer w0.6: LED4.1 R14.2
NetR4_2: R4.2 R8.2 U2.35 | length 36
  Top Layer w0.3: U2.35 4.826,37.363 v2(4.826,34.798) ; R8.2 R4.2 v2(20.447,16.002)
  Bottom Layer w0.3: v2(4.826,34.798) 10.541,34.798 16.891,28.448 16.891,19.431 20.114,16.208 20.13,16.208 20.336,16.002 v2(20.447,16.002)
NetR9_2: R9.2 U2.34 | length 47.7
  Top Layer w0.3: v2(4.445,40.259) 5.461,40.259 6.096,39.624 6.096,37.377 U2.34 ; R9.2 22.225,12.502 22.771,11.956 22.975,11.956 v2(23.053,11.877)
  Bottom Layer w0.3: v2(4.445,40.259) 3.683,40.259 2.413,38.989 2.413,34.925 3.429,33.909 10.287,33.909 15.875,28.321 15.875,19.055 v2(23.053,11.877)
NetR15_2: R15.1 U1.44 | length 20.7
  Top Layer w0.3: U1.44 54.622,34.913 55.372,34.163 55.372,32.606 51.943,29.177 v2(51.943,28.067) ; v2(57.185,28.032) 57.185,29.727 R15.1
  Bottom Layer w0.3: v2(51.943,28.067) 53.137,26.873 56.025,26.873 v2(57.185,28.032)
NSS_SPI: C2.2 U1.18 | length 29.3
  Top Layer w0.3: C2.2 21.844,49.53 23.114,48.26 23.114,43.688 32.389,34.413 U1.18
OSC_IN: C13.1 R10.1 U1.5 Y1.2 | length 26.2
  Top Layer w0.3: U1.5 46.978,39.993 47.752,40.767 47.752,45.085 49.843,47.176 49.843,49.822 50.441,50.419 Y1.2 ; R10.1 50.343,54.483 52.324,52.502 52.324,50.351 Y1.2@52.418,50.257
  Top Layer w0.6: Y1.2 Y1.2@52.324,50.351 ; Y1.2@52.418,50.257 56.603,50.257 C13.1
OSC_OUT: C14.1 R10.2 U1.6 Y1.1 | length 24.1
  Top Layer w0.3: U1.6 46.478,40.255 47.244,41.021 47.244,45.847 43.756,49.335 Y1.1 43.756,52.417 45.822,54.483 R10.2
  Top Layer w0.6: C14.1 39.529,50.257 43.594,50.257 Y1.1
PB3: C28.2 R17.2 SW5.3 U1.39 | length 57.8
  Top Layer w0.3: U1.39 53.058,32.413 v2(53.086,32.385)
  Top Layer w0.6: v2(76.371,62.383) 76.392,62.404 76.392,62.553 77.938,64.099 SW5.3 77.938,61.199 78.994,60.142 R17.2 C28.2
  Bottom Layer w0.3: v2(53.086,32.385) 54.864,32.385 55.756,33.277 55.883,33.277 55.885,33.274 57.302,33.274 62.255,38.227 62.255,55.728 65.988,59.46 73.449,59.46 v2(76.371,62.383)
PB4: C27.2 R16.2 SW4.3 U1.40 | length 49.8
  Top Layer w0.3: U1.40 51.766,32.913 52.508,33.655 v2(54.102,33.655)
  Top Layer w0.6: v2(67.354,62.383) 67.354,63.671 67.907,64.224 SW4.3 69.124,61.122 70.104,60.142 R16.2 70.106,59.946 C27.2 C27.2
  Bottom Layer w0.3: v2(54.102,33.655) 54.181,33.734 54.181,34.115 54.737,34.671 57.531,37.465 60.198,37.465 60.706,37.973 60.706,55.753 67.336,62.383 v2(67.354,62.383)
PB12: C29.2 R18.2 SW6.3 U1.25 | length 81.3
  Top Layer w0.3: v2(41.402,28.194) 41.402,28.305 41.912,28.816 41.912,28.834 42.542,29.464 43.053,29.464 ; 43.054,29.465 43.478,29.465 U1.25
  Top Layer w0.6: v2(85.217,62.992) 85.217,63.873 85.568,64.224 SW6.3 86.752,61.148 87.757,60.142 R18.2 C29.2
  Bottom Layer w0.3: v2(41.402,28.194) 41.469,28.261 41.469,29.15 45.085,32.766 45.751,32.766 47.625,34.64 47.625,35.941 58.039,46.355 58.039,59.055 64.262,65.278 82.982,65.278 85.217,63.043 v2(85.217,62.992)
PB13: C30.2 R19.2 SW7.3 U1.26 | length 117.9
  Top Layer w0.3: v2(42.621,28.194) 42.732,28.194 43.149,28.611 43.556,28.611 43.978,29.033 U1.26
  Top Layer w0.6: v2(68.205,43.509) 68.205,44.227 68.931,44.953 69.053,44.953 SW7.3@69.403,45.303 ; SW7.3 SW7.3@69.403,45.303 ; C30.2 R19.2 70.485,42.799 69.403,43.881 SW7.3@69.403,45.303
  Bottom Layer w0.3: v2(42.621,28.194) 42.586,28.229 42.586,29.378 45.339,32.131 45.847,32.131 48.133,34.417 48.133,35.56 58.674,46.101 58.674,58.674 64.643,64.643 82.169,64.643 89.281,57.531 89.281,56.007 88.519,55.245 72.009,55.245 70.358,53.594 70.358,45.212 69.524,44.378 69.074,44.378 68.732,44.036 v2(68.205,43.509)
PB14: C31.2 R20.2 SW8.3 U1.27 | length 125.5
  Top Layer w0.3: v2(44.196,28.194) 44.196,28.305 44.478,28.587 U1.27
  Top Layer w0.6: v2(76.962,43.307) 76.962,44.704 77.211,44.953 77.867,44.953 SW8.3@78.217,45.303 ; SW8.3 SW8.3@78.217,45.303 ; C31.2 C31.2 79.25,41.15 R20.2 79.248,42.545 78.217,43.576 SW8.3@78.217,45.303
  Bottom Layer w0.3: v2(44.196,28.194) 44.196,30.226 45.512,31.542 46.051,31.542 48.722,34.213 48.722,35.26 59.436,45.974 59.436,58.42 65.024,64.008 81.915,64.008 88.519,57.404 88.519,56.388 88.011,55.88 71.882,55.88 69.596,53.594 69.596,46.063 67.291,43.758 67.291,42.867 67.714,42.443 76.098,42.443 v2(76.962,43.307)
PB15: C32.2 R21.2 SW9.3 U1.28 | length 133.3
  Top Layer w0.3: U1.28 44.978,29.033 45.133,28.878 45.133,28.273 v2(45.212,28.194)
  Top Layer w0.6: v2(85.852,43.434) 85.852,44.704 86.101,44.953 86.681,44.953 SW9.3@87.031,45.303 ; SW9.3 SW9.3@87.031,45.303 ; C32.2 R21.2 88.011,42.799 87.031,43.779 SW9.3@87.031,45.303
  Bottom Layer w0.3: v2(45.212,28.194) 45.133,28.273 45.133,28.87 44.815,29.188 44.815,30.242 45.641,31.067 46.307,31.067 49.149,33.909 49.149,34.798 60.071,45.72 60.071,58.166 65.403,63.498 81.536,63.498 87.63,57.404 87.63,56.691 87.454,56.515 71.755,56.515 68.961,53.721 68.961,46.355 66.864,44.258 66.864,42.229 67.183,41.91 84.406,41.91 85.852,43.356 v2(85.852,43.434)
PC13: LED4.2 U1.2 | length 5.3
  Top Layer w0.3: U1.2 48.478,41.493 49.022,42.037 49.911,42.037 LED4.2
RST: C8.2 R2.2 SW1.2 U1.7 | length 29.2
  Top Layer w0.3: U1.7 45.978,40.509 45.974,40.513 45.974,40.894 46.609,41.529 46.609,43.323 46.228,43.704 v2(46.228,43.815)
  Top Layer w0.6: R2.2 31.971,42.258 34.927,42.258 35.022,42.353 35.022,42.153 34.922,42.053 34.922,40.062 36.813,38.171 ; SW1.2 36.813,38.171 ; v2(41.986,43.84) 39.37,41.224 39.37,39.37 38.171,38.171 36.813,38.171
  Bottom Layer w0.6: v2(41.986,43.84) 41.999,43.828 46.215,43.828 v2(46.228,43.815)
RST_SPI: C2.7 U1.19 | length 27.5
  Top Layer w0.3: C2.7 21.844,44.196 32.127,33.913 U1.19
RX0_FLASH: C5.4 R9.1 | length 8.4
  Top Layer w0.3: R9.1 25.908,12.7 29.718,8.89 C5.4
SCK_ESP: C5.9 U2.30 | length 38.1
  Top Layer w0.3: v2(10.033,23.622) 11.938,23.622 13.97,25.654 13.97,31.115 11.176,33.909 11.176,37.363 U2.30
  Bottom Layer w0.3: v2(10.033,23.622) 10.033,12.192 12.319,9.906 14.351,9.906 C5.9
SCK_STM: C2.6 U1.15 | length 24.8
  Top Layer w0.3: v2(40.005,36.195) 40.116,36.195 40.398,35.913 U1.15
  Bottom Layer w0.3: C2.6 24.384,42.926 31.115,36.195 v2(40.005,36.195)
SCL1: C3.4 C35.4 U1.42 | length 45
  Top Layer w0.3: v2(46.126,34.214) 46.238,34.214 46.538,33.913 U1.42
  Bottom Layer w0.3: C35.4 45.999,62.763 C3.4 45.974,55.583 40.894,50.503 40.894,42.164 44.958,38.1 44.958,35.346 46.09,34.214 v2(46.126,34.214)
SCL2: C4.6 U1.21 | length 61.6
  Top Layer w0.3: C4.6 5.08,45.974 2.794,45.974 1.397,47.371 1.397,53.467 2.921,54.991 7.62,54.991 9.982,52.629 9.982,51.511 10.541,50.952 13.31,50.952 31.349,32.913 U1.21
SCL_ESP: C5.10 U2.36 | length 82.4
  Top Layer w0.3: U2.36 3.549,40.76 3.937,41.148 v2(6.604,41.148)
  Bottom Layer w0.3: v2(6.604,41.148) 6.604,40.005 21.082,25.527 31.369,25.527 37.211,19.685 37.211,12.014 33.528,8.331 33.528,6.096 32.385,4.953 16.764,4.953 C5.10
SDA1: C3.3 C35.3 U1.43 | length 44.2
  Top Layer w0.3: v2(46.736,35.433) 46.815,35.354 46.815,35.1 47.502,34.413 U1.43
  Bottom Layer w0.3: v2(46.736,35.433) 46.815,35.512 46.815,36.02 53.467,42.672 53.467,57.785 C3.3 48.539,62.763 C35.3
SDA2: C4.5 U1.22 | length 43.5
  Top Layer w0.3: C4.5 14.732,48.641 30.96,32.413 U1.22
SDA_ESP: C5.11 U2.33 | length 84.9
  Top Layer w0.3: U2.33 7.359,39.998 v2(8.509,41.148)
  Bottom Layer w0.3: v2(8.509,41.148) 8.509,39.497 21.717,26.289 31.623,26.289 38.227,19.685 38.227,10.256 35.992,8.021 35.992,6.02 33.655,3.683 15.494,3.683 C5.11
STM_RXD1: R1.1 U1.31 | length 26.3
  Top Layer w0.3: R1.1 v2(27.305,34.417) ; U1.31 46.478,28.563 46.736,28.305 v2(46.736,28.194)
  Bottom Layer w0.3: v2(27.305,34.417) 27.321,34.401 27.829,34.401 34.845,27.385 45.927,27.385 v2(46.736,28.194)
STM_TXD1: R3.1 U1.30 | length 26.5
  Top Layer w0.3: R3.1 v2(27.432,31.242) ; U1.30 45.978,27.555 v2(46.736,26.797)
  Bottom Layer w0.3: v2(27.432,31.242) 29.21,31.242 33.655,26.797 v2(46.736,26.797)
SWDCLK: C1.3 U1.37 | length 27.1
  Top Layer w0.3: U1.37 51.166,31.413 51.943,30.636 v4(51.943,30.607)
  Bottom Layer w0.3: C1.3 48.895,9.017 49.53,9.652 51.816,11.938 51.816,23.368 51.054,24.13 51.054,29.718 v4(51.943,30.607)
SWDIO: C1.2 U1.34 | length 25
  Top Layer w0.3: v5(47.777,28.169) 47.777,28.277 47.978,28.477 U1.34
  Bottom Layer w0.3: C1.2 46.355,9.017 46.99,9.652 49.403,12.065 49.403,20.955 47.371,22.987 47.371,25.155 47.777,25.562 v5(47.777,28.169)
TX0_FLASH: C5.3 R8.1 | length 23.3
  Top Layer w0.3: R8.1 16.637,12.629 16.987,12.278 17.185,12.278 18.669,10.795 19.939,10.795 20.345,11.201 20.345,13.665 21.641,14.961 25.222,14.961 32.045,8.137 32.045,7.452 C5.3
VCC: C20.1 C23.1 JDC1.1 XL1.1 | length 20.3
  Top Layer w0.6: XL1.1@73.787,10.922 XL1.1 75.487,10.699 75.964,11.176 78.409,11.176 78.886,10.699 80.586,10.699 C20.1 ; JDC1.1 JDC1.1@89.535,14.478
  Top Layer w1: C20.1 83.959,10.386 84.636,9.709 C23.1 87.346,9.709 87.446,9.809 87.446,10.865 89.535,12.954 JDC1.1
VESP: C5.1 C7.1 C17.1 C18.2 R4.1 R5.1 R11.1 R12.1 U2.2 U3.2 U3.4 | length 138.5
  Top Layer w0.6: U2.2 2.32,20.329 2.32,18.889 3.556,17.653 6.256,17.653 7.804,16.105 C7.1 ; R5.1 11.503,15.802 11.503,14.659 11.938,14.224 15.057,14.224 16.637,15.804 16.637,16.2 17.658,17.221 24.46,17.221 27.529,14.153 28.773,14.153 ; R11.1 38.394,24.528 40.259,22.663 40.259,17.03 42.176,15.113 44.395,15.113 46.355,17.074 R12.1 47.655,17.272 48.006,16.921 48.006,14.859
  Top Layer w1: C7.1 11.303,16.005 R5.1 ; 28.773,14.153 30.424,14.153 C5.1 ; 48.006,14.859 49.784,13.081 U3.4 ; v3(55.999,16.891) 55.947,16.839 55.544,16.839 54.885,16.18 U3.4 ; C17.1@56.387,5.4 59.936,5.4 C18.2 59.971,5.365 63.596,5.365 v3(63.627,5.334) ; v3(63.5,13.081) U3.2 U3.4
  Bottom Layer w1: C5.1 37.338,5.08 39.37,3.048 56.515,3.048 58.293,4.826 58.293,14.597 v3(55.999,16.891) ; v3(63.5,13.081) 63.5,5.534 63.627,5.407 v3(63.627,5.334)
VSTM: C1.1 C2.1 C4.1 C6.2 C9.2 C10.2 C11.2 C12.2 C24.1 C25.2 R2.1 R13.1 R14.1 R16.1 R17.1 R18.1 R19.1 R20.1 R21.1 U1.9 U1.24 U1.36 U1.48 U4.2 U4.4 | length 338.8
  Top Layer w0.3: U1.24 43.58,31.413 44.933,32.766 47.777,32.766 48.978,31.565 U1.36 48.978,27.855 52.502,24.331 52.502,22.981 52.678,22.806 U4.4@54.685,22.806 ; 44.978,32.766 U1.9 ; U1.48 52.231,36.913 54.818,39.5 C10.2 ; 56.485,42.448 57.466,42.448 C10.2 ; C12.2 57.409,32.898 C11.2 57.466,36.125 C10.2
  Top Layer w0.6: C4.1 5.207,68.834 9.144,72.771 14.732,72.771 19.304,68.199 19.304,51.093 C2.1 ; 19.47,51.093 20.828,52.451 27.483,52.451 30.226,49.708 30.226,46.101 31.478,44.849 31.478,44.65 31.679,44.45 R2.1 32.075,44.45 33.909,46.284 33.909,48.641 39.785,54.517 39.785,58.835 48.006,67.056 56.261,67.056 v3(66.04,57.277) ; C1.1 43.815,9.803 44.512,10.5 C6.2@44.512,12.703 ; v2(44.196,47.117) 44.217,47.096 44.217,46.786 45.466,45.537 R13.1 ; v2(50.292,43.942) R14.1 50.292,45.537 51.49,46.736 54.767,46.736 55.118,46.385 55.118,43.815 56.485,42.448 ; v3(54.61,28.067) 54.533,28.144 54.533,30.555 56.471,32.493 57.104,32.493 57.404,32.793 C12.2 ; U4.4 U4.2 U4.2@61.131,22.86 ; C25.2 66.829,20.32 64.289,22.86 U4.2@61.131,22.86 ; C24.1 63.031,24.76 U4.2@61.131,22.86 ; v4(67.31,39.497) 67.329,39.516 67.329,40.08 68.199,40.95 R19.1 ; R16.1 67.818,59.746 68.94,58.624 68.94,57.425 v2(68.961,57.404) ; v4(76.327,39.497) 76.327,39.524 76.762,39.959 76.762,40.948 R20.1 ; R17.1 76.708,58.293 v2(77.597,57.404) ; v4(84.836,39.497) 84.855,39.516 84.855,40.08 85.725,40.95 R21.1 ; R18.1 85.471,58.293 v2(86.36,57.404)
  Top Layer w0.8: v3(54.61,28.067) 54.62,28.057 U4.4@54.62,22.871
  Top Layer w1: U4.4@54.62,22.871 U4.4 ; U4.4@54.685,22.806 54.685,20.118 v3(54.737,20.066)
  Bottom Layer w0.6: v2(44.196,47.117) 45.974,47.117 49.149,43.942 v2(50.292,43.942) ; v3(54.61,28.067) 64.643,38.1 ; v3(66.04,57.277) 66.04,54.483 ; v4(84.836,39.497) v4(76.327,39.497) v4(67.31,39.497) 66.04,39.497 64.643,38.1 ; v2(86.36,57.404) v2(77.597,57.404) v2(68.961,57.404) 66.04,54.483 ; 64.643,38.1 64.643,53.086 66.04,54.483
  Bottom Layer w1: C1.1 46.228,4.826 52.197,4.826 53.213,5.842 53.213,18.542 v3(54.737,20.066)
pads on no net: C33.1 C33.2 C33.3 C33.4 C33.5 C33.6 C33.7 C33.8 C34.1 C34.2 C34.3 C34.4 C34.5 C34.6 C34.7 C34.8 SW4.1 SW4.2 SW5.1 SW5.2 SW6.1 SW6.2 SW7.1 SW7.2 SW8.1 SW8.2 SW9.1 SW9.2 U1.1 U1.3 U1.4 U1.10 U1.14 U1.29 U1.32 U1.33 U1.38 U1.41 U1.45 U1.46 U2.4 U2.5 U2.6 U2.7 U2.8 U2.9 U2.11 U2.12 U2.13 U2.14 U2.17 U2.18 U2.19 U2.20 U2.21 U2.22 U2.23 U2.26 U2.32 Y1.0

## Polygon pours and split planes (outlines as drawn)
GND on Top Layer "GND_L01_P016" (solid, remove dead copper, pour order 16): 0.279,74.574 98.984,74.574 98.984,-0.102 98.958,-0.127 0.279,-0.127
+5 on Top Layer "+5_L01_P004" (solid, pour order 4): 59.436,15.802 59.436,14.859 61.849,14.859 61.849,14.732 62.611,13.97 69.215,13.97 70.739,12.446 70.739,9.779 70.993,9.525 71.501,9.525 71.755,9.779 71.755,13.081 70.358,14.478 70.358,16.637 70.231,16.764 69.977,17.018 60.381,17.018
GND on Top Layer "GND_L01_P015" (solid, pour order 15): 1.092,31.547 1.118,31.521 10.643,31.521 10.643,31.465 11.887,30.22 11.887,25.527 10.77,24.409 1.143,24.409 1.143,31.547
VESP on Top Layer "VESP_L01_P013" (solid, pour order 13): 54.204,17.983 54.458,17.983 56.388,17.983 57.937,16.434 57.937,11.709 56.769,10.541 52.781,10.541 50.876,12.446 49.454,12.446 47.168,14.732 41.427,14.732 39.675,16.485 39.675,22.657 38.252,24.079 38.252,24.994 38.786,24.994 40.945,22.835 40.945,17.094 42.342,15.697 44.323,15.697 45.695,17.069 45.695,17.983 54.026,17.983 54.127,17.983
+5 on Top Layer "+5_L01_P005" (solid, pour order 5): 59.055,25.654 59.182,25.781 60.96,25.781 64.77,29.591 65.786,29.591 66.167,29.972 67.564,29.972 67.818,29.718 67.818,28.575 67.691,28.448 65.786,28.448 65.278,28.448 61.849,25.146 61.849,24.638 61.722,24.511 59.182,24.511 59.055,24.638
VSTM on Top Layer "VSTM_L01_P011" (solid, pour order 11): 56.68,43.548 56.236,43.104 56.236,32.004 56.591,31.725 56.667,31.725 57.887,31.725 58.242,32.08 58.242,43.155 57.848,43.548
VSTM on Top Layer "VSTM_L01_P010" (solid, pour order 10): 54.178,28.956 53.238,28.016 51.943,26.721 51.943,20.599 53.746,18.796 55.423,18.796 55.423,18.923 56.439,19.939 56.439,21.336 57.226,22.123 62.763,22.123 63.398,22.123 63.398,25.044 62.662,25.044 61.011,23.393 56.439,23.393 56.439,24.333 56.439,27.407 54.889,28.956
VCC on Top Layer "VCC_L01_P009" (solid, pour order 9): 73.457,11.735 74.143,11.735 74.295,11.582 75.819,11.582 75.844,11.608 78.562,11.633 79.096,11.633 79.527,11.633 79.68,11.633 79.781,11.633 81.966,11.633 82.525,11.074 82.525,11.049 84.379,11.049 85.014,10.541 85.141,10.541 86.563,10.541 86.563,11.201 88.062,12.7 88.062,15.062 88.875,15.875 90.272,15.875 91.084,15.062 91.084,12.217 90.272,11.405 89.179,11.405 88.265,10.439 88.265,10.389 88.265,9.144 87.897,8.877 87.859,8.839 84.455,8.839 83.591,9.703 82.474,9.703 81.839,9.068 79.248,9.068 77.927,10.312 77.8,10.312 74.422,10.312 74.422,9.804 74.219,9.601 73.381,9.601 73.228,9.754 73.228,11.506
+5 on Top Layer "+5_L01_P008" (solid, pour order 8): 88.519,30.099 89.154,30.734 91.567,30.734 94.361,27.94 94.361,24.892 89.281,19.812 89.281,16.764 88.138,15.621 80.137,15.621 79.629,16.129 79.629,16.891 80.137,17.399 87.757,17.399 88.265,17.907 88.265,20.574 92.583,24.892 92.583,25.908 92.075,26.416 89.281,26.416 88.519,27.178
GND on Bottom Layer "GND_L02_P017" (solid, remove dead copper, pour order 17): 0.305,74.397 0.381,74.397 99.009,74.397 99.009,-0.152 0.305,-0.152 0.305,74.371
VESP on Bottom Layer "VESP_L02_P014" (solid, pour order 14): 55.093,16.231 55.093,17.831 62.078,17.831 64.999,14.91 64.999,2.235 36.83,2.235 36.83,2.515 36.83,2.718 36.83,5.766 36.855,5.74 37.795,5.74 39.764,3.772 55.093,3.772
VSTM on Bottom Layer "VSTM_L02_P012" (solid, pour order 12): 53.848,28.397 53.848,27.737 54.254,27.33 54.94,27.33 55.347,27.737 66.548,38.938 85.09,38.938 85.344,39.192 85.344,39.751 85.09,40.005 66.243,40.005 65.888,40.361 65.888,53.442 69.469,57.023 86.766,57.023 86.766,57.734 86.436,58.064 65.888,58.064 63.868,56.045 63.868,38.417
+5 on Bottom Layer "+5_L02_P007" (solid, pour order 7): 62.001,26.949 62.332,27.28 65.43,27.28 70.612,22.098 70.612,19.812 76.327,14.097 79.248,14.097 79.908,14.757 79.908,17.17 80.137,17.399 81.661,17.399 95.58,31.318 95.58,64.821 93.98,66.421 53.848,66.421 51.943,64.516 51.943,62.357 51.435,61.849 50.673,61.849 50.165,62.357 50.165,63.246 50.165,65.024 53.213,68.072 95.25,68.072 97.155,66.167 97.155,30.861 81.915,15.621 81.28,14.986 81.28,14.478 79.756,12.954 75.692,12.954 72.771,15.875 69.723,15.875 69.266,16.332 69.266,16.713 69.698,17.145 71.12,17.145 71.247,17.272 69.342,19.177 69.342,21.59 64.77,26.162 62.357,26.162 62.001,26.518

## Silkscreen, mask and mechanical layers (free items; w line width, h text height)
Top Overlay:
  lines w0.254: 11.074,48.26 16.535,48.26 ; 13.805,46.812 13.805,49.708 ; 29.693,48.26 35.687,48.26 ; 32.652,46.812 32.652,49.708 ; 11.074,46.812 16.535,46.812 16.535,49.708 11.074,49.708 11.074,46.812 ; 29.693,46.812 35.687,46.812 35.687,49.708 29.693,49.708 29.693,46.812
  text "SX1278 LoRA" at 15.24,62.027 h1.52
  text "LCD1604" at 44.882,56.972 h1.52
  text "FAN_SW" at 86.591,56.051 h0.71
  text "LIGHT_SW" at 77.32,56.026 h0.71
  text "WATER_PUMP" at 67.617,55.924 h0.71
  text "VSTM" at 12.003,48.858 h0.25
  text "NSS_SPI" at 14.365,48.85 h0.25
  text "MOSI_STM" at 30.24,48.824 h0.25
  text "DIO0_SPI" at 33.262,48.824 h0.25
  text "SCK_STM" at 30.291,47.427 h0.25
  text "GND" at 12.13,47.385 h0.25
  text "RST_SPI" at 14.39,47.402 h0.25
  text "MISO_STM" at 33.212,47.376 h0.25
  text "STM_JP" at 2.718,46.431 h1.52 r90
  text "PREV_ST" at 77.929,37.357 h0.71
  text "MANUAL" at 87.2,37.239 h0.71
  text "NEXT_ST" at 69.192,37.205 h0.71
  text "RST_STM" at 30.918,32.387 h0.71 r90
  text "BOOT0" at 41.933,21.541 h0.71 r90
  text "ENABLE" at 31.087,21.287 h0.71 r90
  text "ST-LINK" at 42.799,3.023 h1.52
  text "ESP_JP" at 18.39,2.997 h1.52
Bottom Overlay:
  drawing of 78 lines, arcs and shapes, not listed
  text "+5VDC" at 52.277,65.982 h0.46 r60
  text "SCL1" at 46.901,65.592 h0.46 r60
  text "SDA1" at 49.509,65.55 h0.46 r60
  text "GND" at 54.335,65.194 h0.46 r60
  text "VSTM" at 2.983,58.535 h0.46
  text "ADC2/TX2" at 3.745,56.021 h0.46
  text "ADC3/RX2" at 3.796,53.379 h0.46
  text "ADC1" at 2.806,50.89 h0.46
  text "SDA2" at 2.856,48.426 h0.46
  text "SCL2" at 2.806,45.886 h0.46
  text "GND" at 2.577,43.295 h0.46
  text "AgriTomato / October 2025 / Ver.01 | ID: 2112363" at 32.893,25.933 h1
  text "RX0_FLASH" at 31.834,11.794 h0.46 r60
  text "TX0_FLASH" at 34.4,11.794 h0.46 r60
  text "MISO_ESP" at 24.068,11.181 h0.46 r60
  text "MOSI_ESP" at 26.582,11.156 h0.46 r60
  text "SDA_ESP" at 13.704,10.978 h0.46 r60
  text "SCL_ESP" at 16.27,10.927 h0.46 r60
  text "SCK_ESP" at 18.81,10.851 h0.46 r60
  text "GPIO25" at 36.174,10.508 h0.46 r60
  text "SWDCLK" at 50.245,10.508 h0.46 r60
  text "CS_ESP" at 21.045,10.47 h0.46 r60
  text "GPIO13" at 28.579,10.406 h0.46 r60
  text "SWDIO" at 47.502,9.975 h0.46 r60
  text "VSTM" at 44.784,9.746 h0.46 r60
  text "VESP" at 38.383,9.67 h0.46 r60
  text "GND" at 10.209,9.622 h0.46 r60
  text "GND" at 52.201,9.289 h0.46 r60
Mechanical 1:
  lines w0.254: -0.254,0.762 ccw(c1.016,0.762) 1.016,-0.508 98.171,-0.508 ccw(c98.171,0.762) 99.441,0.762 99.441,0.889 99.441,73.787 ccw(c98.171,73.787) 98.171,75.057 1.016,75.057 ccw(c1.016,73.787) -0.254,73.787 -0.254,71.882 -0.254,2.921 -0.254,0.762
Board Shape:
  lines w0.508: 99.44,73.754 ccw(c98.214,73.754) 98.214,74.981 0.584,74.981 ccw(c0.584,74.066) -0.33,74.066 -0.33,0.635 ccw(c0.94,0.635) 0.94,-0.635 98.247,-0.635 ccw(c98.247,0.635) 99.517,0.635 99.44,73.754

## Text inside footprints (layer, text, board x,y; h text height)
U2: Mechanical 13 "ANTENNA" at -2.731,22.87 h1.78 r90